# Altium PCB Mega8515_flasher_v2.PcbDoc
Units mm, origin at the board's own origin, x right, y up, seen from the top; angles counter-clockwise.
Board outline 47.27 x 49.53 mm, 2 copper layers (Top, Bottom), stack 1.67 mm thick; 19 components, 45 nets, 153 pads, 83 vias.
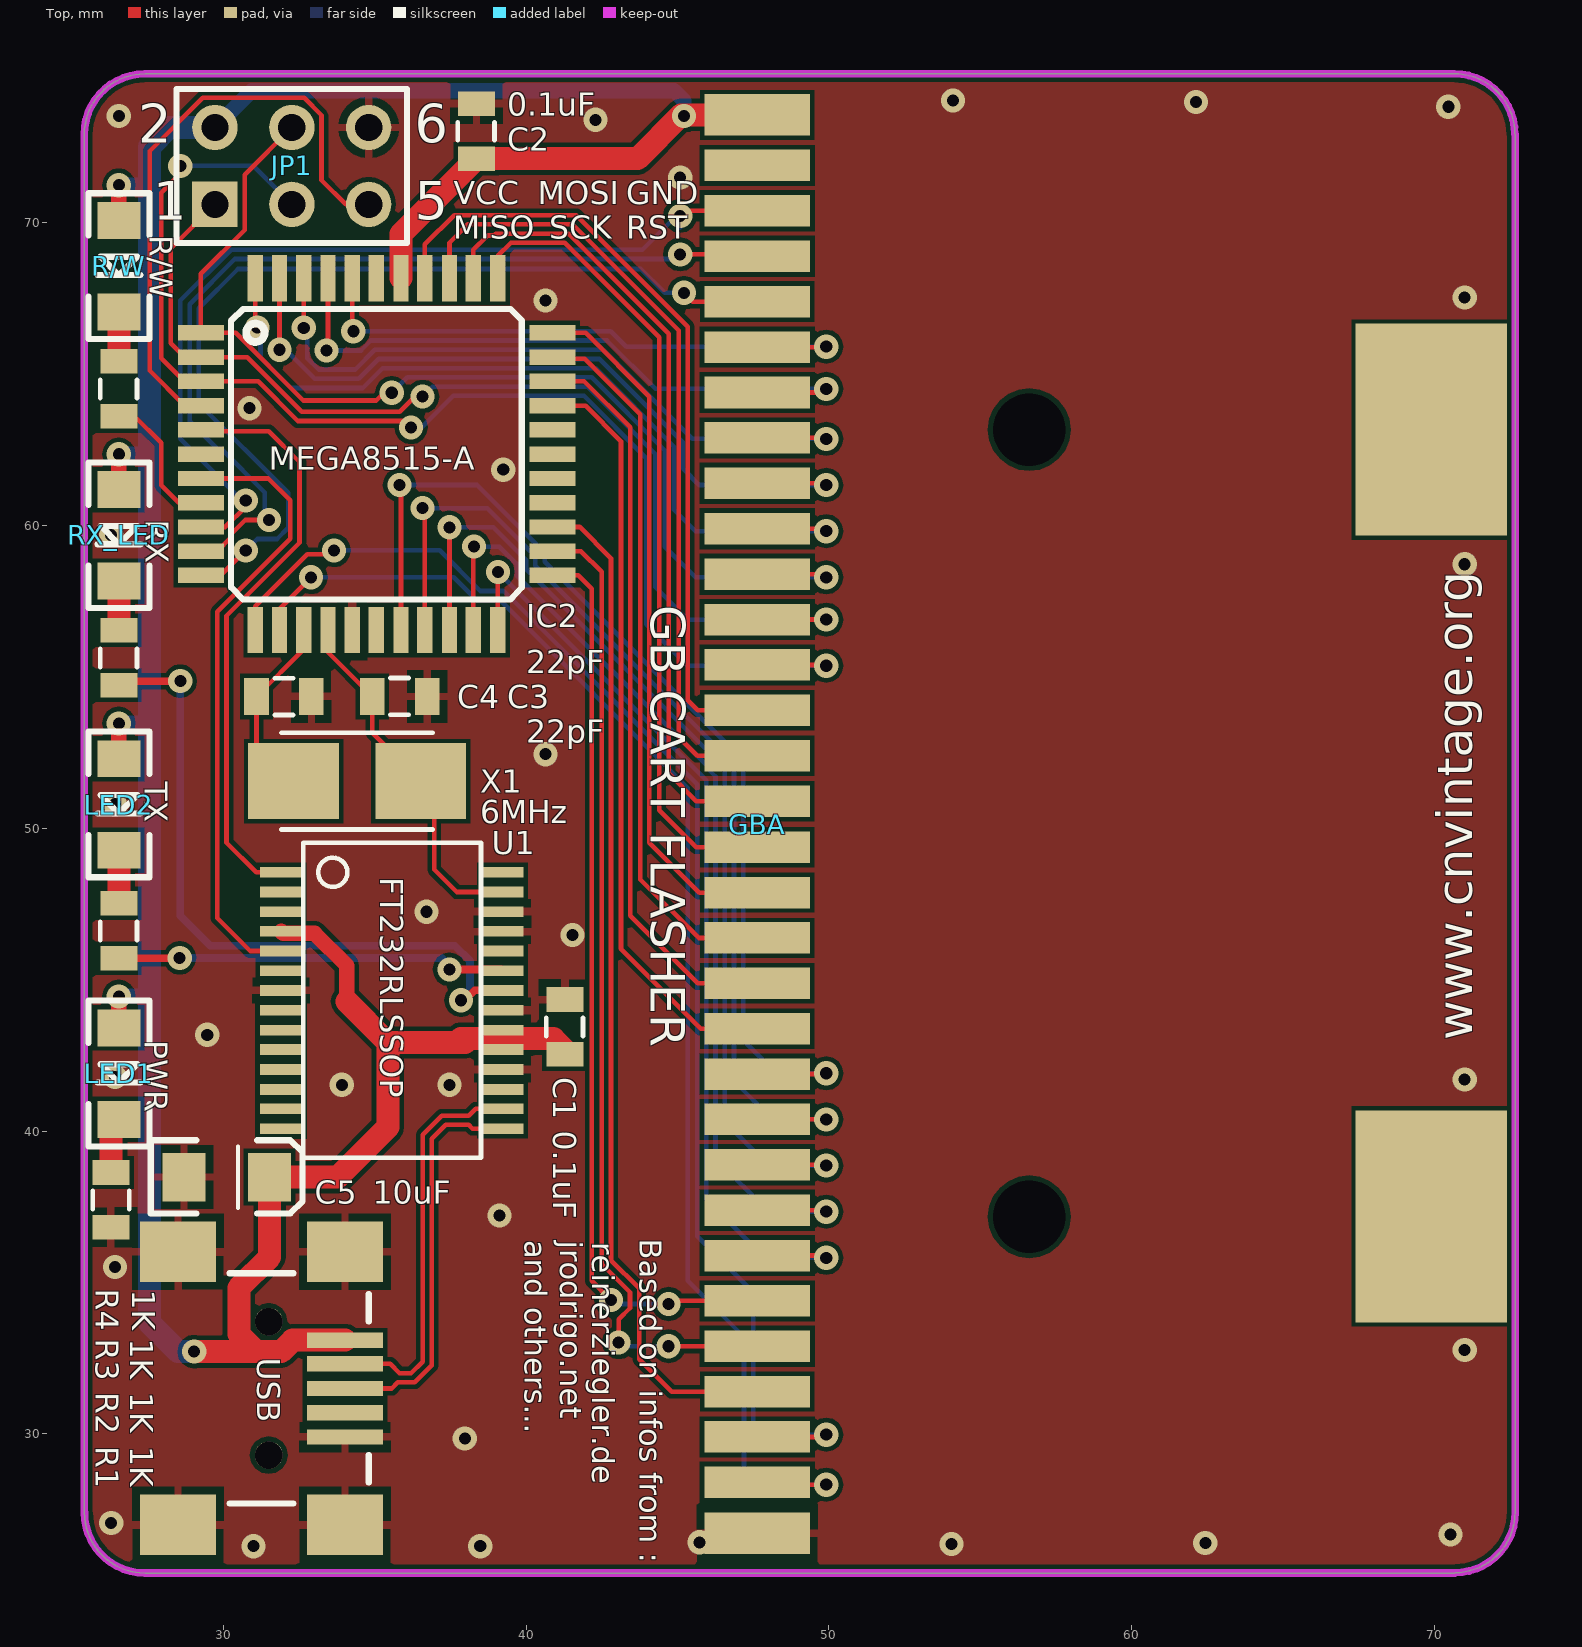
[diagram p0: Top view]
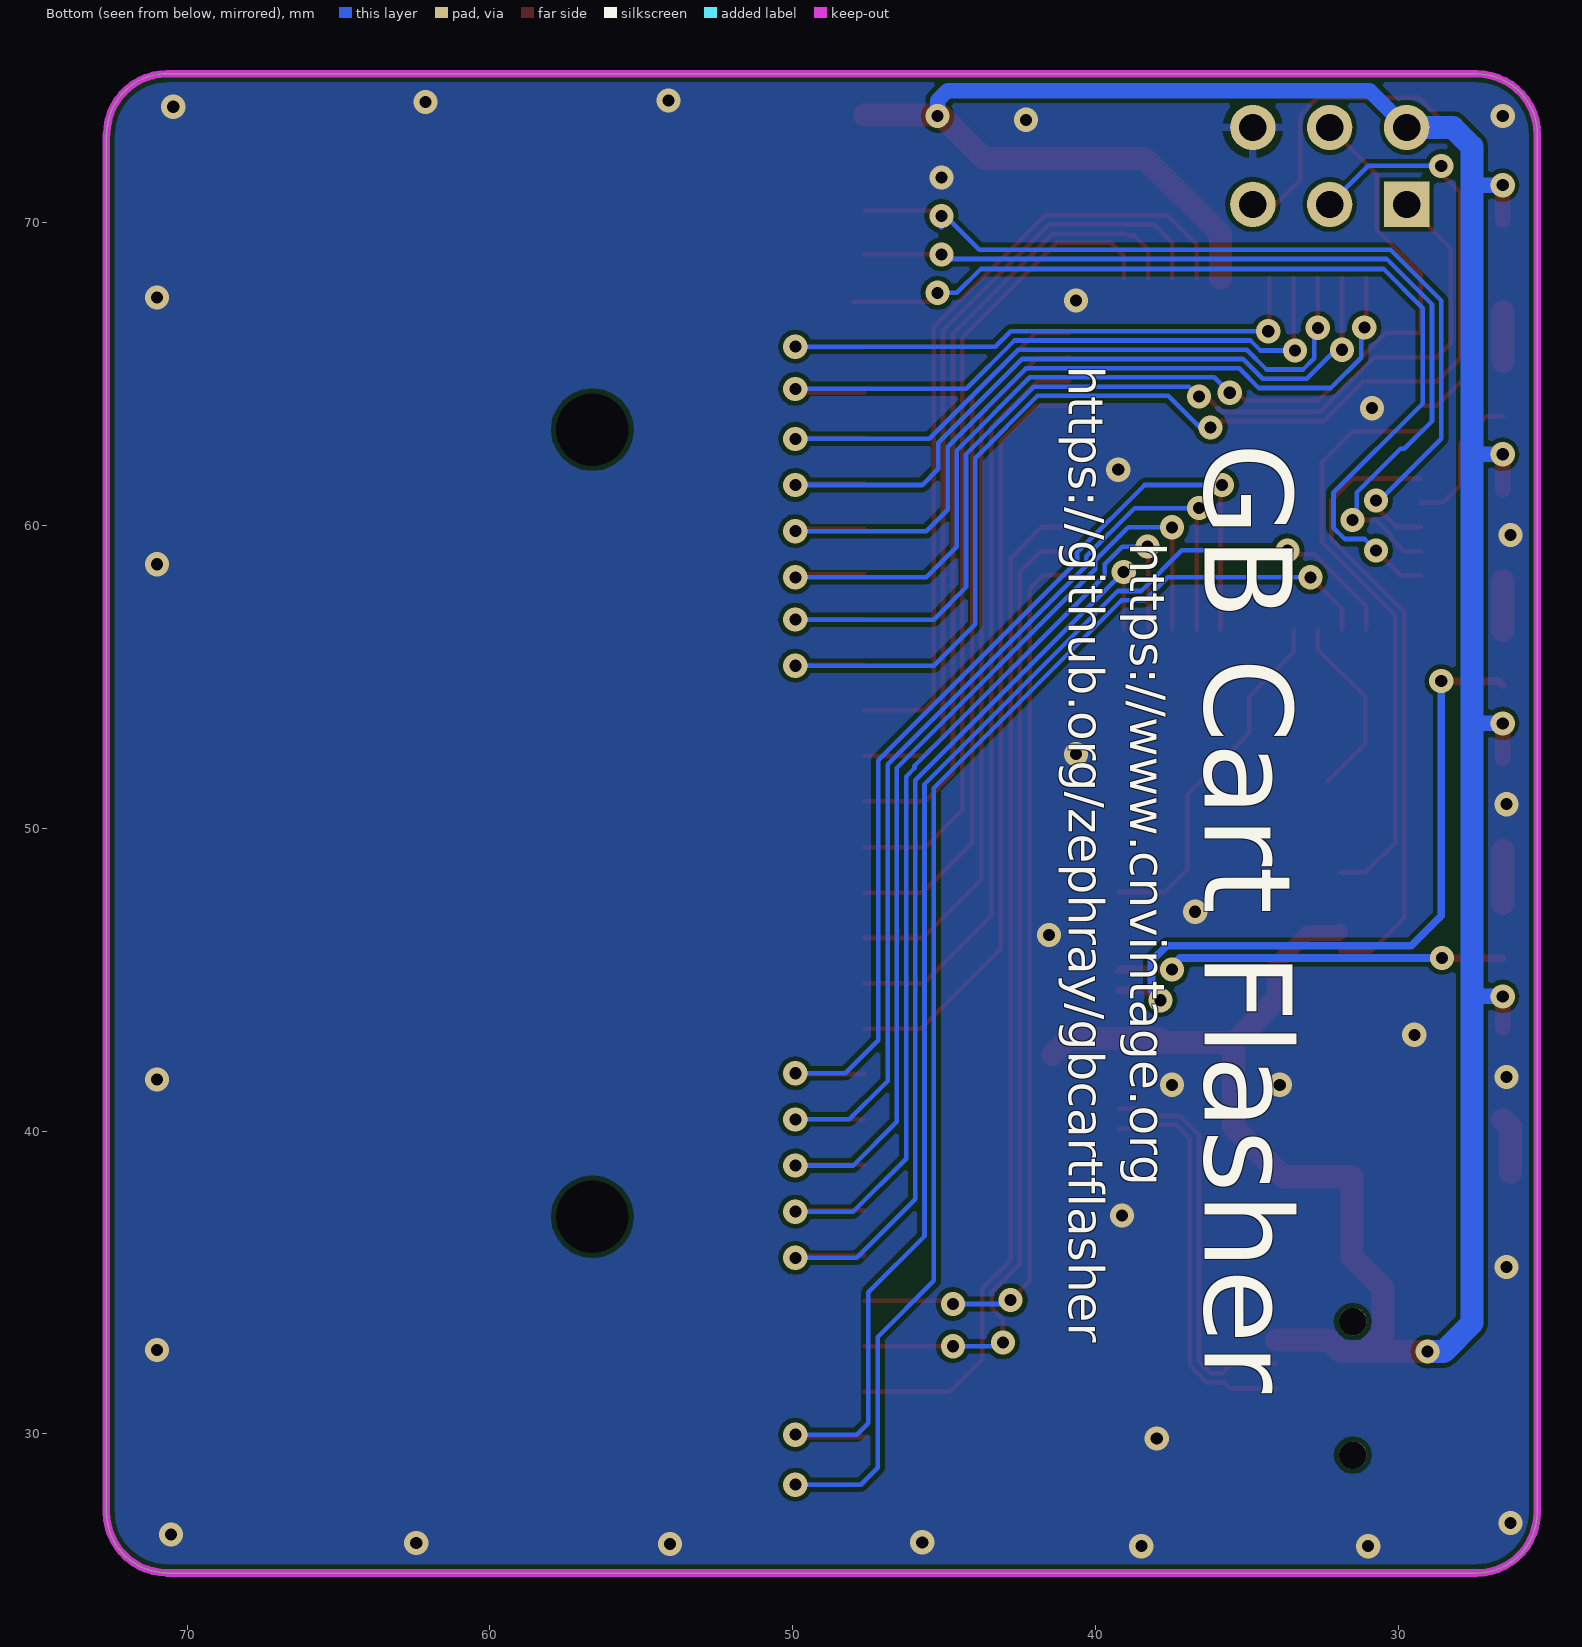
[diagram p1: Bottom view, seen from below]

## Layer stack, top to bottom
Top Solder: solder mask 0.0102, Solder Resist, Dk 3.5
Top: signal copper 0.035
Dielectric 1: core 1.6, FR-4, Dk 4.8
Bottom: signal copper 0.035
Bottom Solder: solder mask 0.0102, Solder Resist, Dk 3.5

## Board outline
25.407,27.4 ccw(c27.407,27.4) 27.407,25.4 70.669,25.4 70.669,25.412 ccw(c70.669,27.412) 72.669,27.412 72.669,72.93 72.658,72.93 ccw(c70.658,72.93) 70.658,74.93 70.657,74.93 27.407,74.93 27.4,74.923 ccw(c27.4,72.923) 25.4,72.923

## Design rules (kind name [scope] priority, off if disabled: settings)
Clearance mdViaVia [IsVia vs IsVia] p1: gap=0.203
Clearance mdPadVia [IsPad vs IsVia] p2: gap=0.152
Clearance mdPadPad [IsPad vs IsPad] p3: gap=0.152
Clearance mdWireVia [(InLayerClass('Signal Layers') AND IsTrack) vs IsVia] p4: gap=0.152
Clearance mdWirePad [(InLayerClass('Signal Layers') AND IsTrack) vs IsPad] p5: gap=0.152
Clearance mdWireWire [(InLayerClass('Signal Layers') AND IsTrack) vs (InLayerClass('Signal Layers') AND IsTrack)] p6: gap=0.152
Clearance [All] p7: gap=0.152
ComponentClearance [All] p1: gap=0 collisioncheckmode=3 verticalgap=0 showdistances=FALSE
HoleSize [All] p1: absolutevalues=TRUE maxlimit=2540 minlimit=0.305 maxpercent=80.000 minpercent=20.000
HoleToHoleClearance [All] p1: gap=0.203 allowstackedmicrovias=TRUE
PolygonConnect ThermalVias [IsVia] p1: connectstyle=Direct reliefconductorwidth=0.254 reliefentries=4 polygonreliefangle="90 Angle" airgapwidth=0.254
PolygonConnect [All] p2: connectstyle=Relief reliefconductorwidth=0.254 reliefentries=4 polygonreliefangle="90 Angle" airgapwidth=0.254
RoutingVias [All] p1: holewidth=0.4 width=0.8 viastyle="Through Hole" minholewidth=0.4 minwidth=0.8 maxholewidth=0.4 maxwidth=0.8
SilkToSilkClearance [All] p1 off: silktosilkclearance=0.254
SilkToSolderMaskClearance [IsPad] p1 off: minsilkscreentomaskgap=0.254 clearancetoexposedcopper=TRUE
SolderMaskExpansion [All] p1: expansion=0
Width [All] p1: maxlimit=2540 minlimit=0.152 preferedwidth=0.254
25 further rules are at their usual default settings.

## Components (designator, comment, footprint, x,y, rotation, side; value= is the part's Value field where it differs from the comment)
C1 "0.1uF" 0805 41.275,43.434 r90 top
C2 "0.1uF" 0805 38.354,73.025 r90 top
C3 "22pF" 0805 35.814,54.356 r0 top
C4 "22pF" 0805 32.004,54.356 r180 top
C5 "10uF" EIA3216 30.099,38.481 r0 top
GBA "GB_CART1" GB_CART_1 47.752,50.673 r270 top
IC2 "MEGA8515-A" TQFP44 35.052,62.357 r0 top
JP1 "SPARKFUN-CONNECTORS_M03X2SMT" HDR2X3 29.718,70.612 r0 top
LED1 "PWR_LED" LED-1206 26.543,41.91 r270 top
LED2 "TX_LED" LED-1206 26.543,50.8 r270 top
R1 "1K" 0805 26.289,37.719 r90 top
R2 "1K" 0805 26.543,46.609 r90 top
R3 "1K" 0805 26.543,55.626 r90 top
R4 "1K" 0805 26.543,64.516 r90 top
R/W "LED4" LED-1206 26.543,68.58 r270 top
RX_LED "LED3" LED-1206 26.543,59.69 r270 top
U1 "FT232RLSSOP" SSOP28DB 35.56,44.323 r270 top
USB "USB-MINIB-5PIN" USB-MINIB 31.496,31.496 r0 top
X1 "6MHz" 5032 34.417,51.562 r180 top

## Footprints (in the part's own frame and the unit in brackets; to place one, negate y for a bottom-side part, rotate by r counter-clockwise, add the part's x,y. Pads: shape width x height; smd on the part's side, far side on the other; paste and mask are expansions set on the pad)
0805 [mil] "0805"
  rect 32x48 smd: 1(-35.43,0) 2(36,0)
  silkscreen extent -12,-24 12,24
5032 [mm]
  rect 3x2.5 smd: 1(-2.1,0) 2(2.1,0)
  silkscreen extent -2.5,-1.6 2.5,1.6
EIA3216 [mil] "EIA3216"
  rect 56x63 smd: A(56,0) C(-55.12,0)
  silkscreen extent -98,-47 99,48
GB_CART_1 [mil] "GB_CART_1"
  rect 54x137 smd: 1(-901.38,-4.72) 32(943,-4.72)
  rect 41x137 smd: 2(-835.63,-4.72) 3(-776.57,-4.72) 4(-717.52,-4.72) 5(-658.46,-4.72) 6(-599.41,-4.72) 7(-540.35,-4.72) 8(-481.3,-4.72) 9(-422.24,-4.72) 10(-363.19,-4.72) 11(-304.13,-4.72) 12(-245.08,-4.72) 13(-186.02,-4.72) 14(-126.97,-4.72) 15(-67.91,-4.72) 16(-8.86,-4.72) 17(51,-4.72) 18(110,-4.72) 19(169,-4.72) 20(228,-4.72) 21(287,-4.72) 22(346,-4.72) 23(405,-4.72) 24(464,-4.72) 25(523,-4.72) 26(582,-4.72) 27(641,-4.72) 28(700,-4.72) 29(759,-4.72) 30(818,-4.72) 31(877,-4.72)
HDR2X3 [mm] "Connector; Header; 3x2 Position"
  rect 1.5x1.5 hole 0.9: 1(0,0)
  round 1.5 hole 0.9: 2(0,2.54) 3(2.54,0) 4(2.54,2.54) 5(5.08,0) 6(5.08,2.54)
  silkscreen extent -1.27,-1.27 6.35,3.81
LED-1206 [mil] "LED-1206"
  rect 48x56 smd: A(-59.06,0) C(60,0)
  silkscreen extent -94,-39 95,40
SSOP28DB [mil] "SSOP28DB"
  rect 14x55 smd: 1(-166.34,-143.94) 2(-140.75,-143.94) 3(-115.16,-143.94) 4(-89.57,-143.94) 5(-63.98,-143.94) 6(-38.39,-143.94) 7(-12.8,-143.94) 8(13,-143.94) 9(39,-143.94) 10(64,-143.94) 11(90,-143.94) 12(116,-143.94) 13(141,-143.94) 14(167,-143.94) 15(167,144) 16(141,144) 17(116,144) 18(90,144) 19(64,144) 20(39,144) 21(13,144) 22(-12.8,144) 23(-38.39,144) 24(-63.98,144) 25(-89.57,144) 26(-115.16,144) 27(-140.75,144) 28(-166.34,144)
  silkscreen extent -205,-115 205,116
TQFP44 [mil] "TQFP44"
  rect 60x20 smd: 1(-228.35,158) 2(-228.35,126) 3(-228.35,95) 4(-228.35,63) 5(-228.35,32) 6(-228.35,0) 7(-228.35,-31.5) 8(-228.35,-62.99) 9(-228.35,-94.49) 10(-228.35,-125.98) 11(-228.35,-157.48) 23(229,-157.48) 24(229,-125.98) 25(229,-94.49) 26(229,-62.99) 27(229,-31.5) 28(229,0) 29(229,32) 30(229,63) 31(229,95) 32(229,126) 33(229,158)
  rect 20x60 smd: 12(-157.48,-228.35) 13(-125.98,-228.35) 14(-94.49,-228.35) 15(-62.99,-228.35) 16(-31.5,-228.35) 17(0,-228.35) 18(32,-228.35) 19(63,-228.35) 20(95,-228.35) 21(126,-228.35) 22(158,-228.35) 34(158,229) 35(126,229) 36(95,229) 37(63,229) 38(32,229) 39(0,229) 40(-31.5,229) 41(-62.99,229) 42(-94.49,229) 43(-125.98,229) 44(-157.48,229)
  silkscreen extent -189,-189 189,189
USB-MINIB [mil] "USB-MINIB"
  round 36 hole 36: 1(0,-86.61) 1(0,87)
  rect 99x20 smd: D+(99,0) D-(99,32) GND(99,-62.99) ID(99,-31.5) VBUS(99,63)
  rect 99x79 smd: MTN1(-118.11,178) MTN2(99,178) MTN3(-118.11,-177.17) MTN4(99,-177.17)
  silkscreen extent -51,-150 130,150

## Part data
C1 C2: library part CAP1206, "<b>Capacitor</b> / Standard 0603 ceramic capacitor, and 0.1\" leaded capacitor."
C3 C4: library part CAP0805, "<b>Capacitor</b> / Standard 0603 ceramic capacitor, and 0.1\" leaded capacitor."
C5: library part 10UF-TANT, "10uF Tantalum SMT<br> / CAP-00811- 16V 10% (EIA-3216)"
IC2: "<b>MICROCONTROLLER</b><p> / 8 Kbytes FLASH<br> / 512 bytes SRAM<br> / 512 bytes EEPROM<br> / USART<br> / 8-channel 10 bit ADC<p> / Source: avr.lbr"
JP1: "2x3 .1\" header.<br> / Shrouded, with keying- CONN-10681<br> / SMT- CONN-11415<br> / Pogo pins- HW-11044"
LED1 LED2 R/W RX_LED: library part LED1206, "<b>LEDs</b> / Standard schematic elements and footprints for 5mm, 3mm, 1206, and 0603 sized LEDs. 5mm - Spark Fun Electronics SKU : COM-00529 (and others)"
R1 R2 R3 R4: library part RESISTOR1206, "<b>Resistor</b> / Basic schematic elements and footprints for 0603, 1206, and PTH resistors."
U1: "<b>USB UART</b> / FT232RL 4<sup>th</sup> Generation USB UART (USB &lt;-&gt; Serial) Controller. <br> / Spark Fun Electronics SKU : COM-00650<br> / Production SKU IC-00870"
USB: "<b>Mini-USB \"B\" connector with 5th pin broken out.</b><p> / Created new symbol breaking out 5th \"ID\" pin in mini/micro USB connector spec.  See: http://en.wikipedia.org/wiki/Mini_usb#Cables.  Uses same footprint as 4-pin symbol.<p> /   / Also added pins to connect to mounting / shield pads if required (probably not generally needed as signals aren't shielded once they leave the connector)."
X1: library part SPARKFUN-FREQCTRL_CRYSTAL, "Various standard crystals. Proven footprints. Spark Fun Electronics SKU : COM-00534"

## Free pads (board coordinates)
  round 0 hole 2.4: 1(56.617,63.17) 2(56.617,37.17)
  rect 5x7 / inner rect 0x0 / far side rect 0x0 all layers, no hole: 3(69.901,63.17) 4(69.901,37.186)

## Via types
v1: diameter 0.8, hole 0.4, Top to Bottom, tented both sides, 82 vias
v2: diameter 0.8, hole 0.4, Top to Bottom, 1 vias

## Nets (pads, with @x,y where several pads share a name; then routed paths per layer and width w, separated by ;. In a path a pad name is that pad's centre, name@x,y a point inside that pad or via, vN(x,y) a via of type N, cw(c..) or ccw(c..) an arc to the next point about the centre after c; other vN are vias at no path point)
/CS: GBA.5 IC2.11 | length 31.8
  Top w0.152: IC2.11 29.909,58.357 v1(30.734,59.182) ; v1(45.212,67.691) 45.505,67.398 GBA.5@48.006,67.398
  Bottom w0.152: v1(30.734,59.182) 31.111,59.559 31.767,59.559 32.135,59.927 32.135,61.083 29.185,64.033 29.185,67.184 30.479,68.478 43.79,68.478 44.577,67.691 v1(45.212,67.691)
/RD: GBA.4 IC2.10 | length 30.5
  Top w0.152: IC2.10 29.791,59.157 30.243,59.608 30.243,59.707 30.723,60.187 v1(31.507,60.187) ; v1(45.085,68.961) GBA.4@47.632,68.961
  Bottom w0.152: v1(31.507,60.187) 31.363,60.331 31.363,61.093 29.922,62.534 29.795,62.534 28.88,63.449 28.88,67.311 30.378,68.809 44.933,68.809 v1(45.085,68.961)
/RST: GBA.30 IC2.12 | length 46.1
  Top w0.152: IC2.12 31.052,57.341 32.766,59.055 33.528,59.055 v1(33.655,59.182) ; GBA.30 49.835,29.896 v1(49.911,29.972)
  Bottom w0.152: v1(33.655,59.182) 37.148,59.182 38.487,57.842 39.263,57.842 45.644,51.461 45.644,36.525 47.498,34.671 47.498,30.353 47.879,29.972 v1(49.911,29.972)
/WR: GBA.3 IC2.9 | length 30.3
  Top w0.152: IC2.9 30.062,59.957 30.734,60.629 v1(30.734,60.833) ; v1(45.085,70.231) 45.252,70.398 GBA.3
  Bottom w0.152: v1(30.734,60.833) 30.607,60.833 28.575,62.865 28.575,67.437 30.251,69.113 43.84,69.113 44.831,70.104 45.085,69.85 v1(45.085,70.231)
A0: GBA.6 IC2.40 | length 19.9
  Top w0.152: IC2.40 34.252,66.459 v1(34.29,66.421) ; GBA.6 49.896,65.898 v1(49.911,65.913)
  Bottom w0.152: v1(34.29,66.421) 42.796,66.421 43.304,65.913 v1(49.911,65.913)
A1: GBA.7 IC2.41 | length 22
  Top w0.152: v1(33.401,65.786) 33.452,65.837 IC2.41 ; GBA.7 49.793,64.398 v1(49.911,64.516)
  Bottom w0.152: v1(33.401,65.786) 34.544,65.786 34.874,66.116 42.67,66.116 44.27,64.516 v1(49.911,64.516)
A2: GBA.8 IC2.42 | length 23.8
  Top w0.152: v1(32.652,66.535) IC2.42 ; GBA.8 49.878,62.898 v1(49.911,62.865)
  Bottom w0.152: v1(32.652,66.535) 32.772,66.415 32.772,65.526 33.141,65.157 34.346,65.157 35,65.811 42.544,65.811 45.49,62.865 v1(49.911,62.865)
A3: GBA.9 IC2.43 | length 25.6
  Top w0.152: v1(31.852,65.811) IC2.43 ; GBA.9 49.854,61.398 v1(49.911,61.341)
  Bottom w0.152: v1(31.852,65.811) 32.056,65.811 33.014,64.853 34.473,64.853 35.127,65.507 42.417,65.507 45.187,62.737 45.187,61.874 45.72,61.341 v1(49.911,61.341)
A4: GBA.10 IC2.44 | length 27.8
  Top w0.152: IC2.44 31.052,66.611 v1(31.115,66.548) ; GBA.10 49.83,59.898 v1(49.911,59.817)
  Bottom w0.152: v1(31.115,66.548) 31.223,66.44 31.223,65.551 32.226,64.548 34.599,64.548 35.253,65.202 42.291,65.202 44.882,62.611 44.882,60.528 45.593,59.817 v1(49.911,59.817)
A5: GBA.11 IC2.1 JP1.4 | length 36.8
  Top w0.152: JP1.4 30.697,71.591 30.697,69.767 29.252,68.323 IC2.1 30.404,66.37 32.639,64.135 35.052,64.135 35.306,64.389 v1(35.56,64.389) ; GBA.11 49.806,58.398 v1(49.911,58.293)
  Bottom w0.152: v1(35.56,64.389) 36.068,64.897 42.163,64.897 44.577,62.483 44.577,59.309 45.593,58.293 v1(49.911,58.293)
A6: GBA.12 IC2.2 JP1.1 | length 36.2
  Top w0.152: JP1.1 28.261,69.155 28.261,66.022 28.726,65.557 IC2.2 30.786,65.557 32.583,63.76 35.82,63.76 36.322,64.262 v1(36.576,64.262) ; GBA.12 49.909,56.898 v1(49.911,56.896)
  Bottom w0.152: v1(36.576,64.262) 36.906,64.592 42.036,64.592 44.272,62.356 44.272,57.963 45.339,56.896 v1(49.911,56.896)
A7: GBA.13 IC2.3 JP1.3 | length 43.4
  Top w0.152: v1(28.575,71.882) 28.575,71.628 27.94,70.993 27.94,65.53 28.7,64.77 IC2.3 31.142,64.77 32.456,63.456 35.985,63.456 v1(36.195,63.246) ; GBA.13 49.885,55.398 v1(49.911,55.372)
  Bottom w0.152: v1(28.575,71.882) 30.988,71.882 JP1.3 ; v1(36.195,63.246) 36.551,63.246 37.592,64.287 41.91,64.287 43.967,62.23 43.967,56.744 45.339,55.372 v1(49.911,55.372)
A8: GBA.14 IC2.37 | length 26.5
  Top w0.152: IC2.37 36.652,69.291 37.617,70.256 41.654,70.256 45.339,66.571 45.339,54.229 45.67,53.898 GBA.14
A9: GBA.15 IC2.36 | length 26.7
  Top w0.152: IC2.36 37.465,69.342 38.075,69.952 41.528,69.952 45.034,66.445 45.034,53.01 45.646,52.398 GBA.15
A10: GBA.16 IC2.35 | length 26.8
  Top w0.152: IC2.35 38.252,69.113 38.724,69.585 38.931,69.585 38.993,69.647 41.401,69.647 44.704,66.344 44.704,51.816 45.622,50.898 GBA.16
A11: GBA.17 IC2.34 | length 26.9
  Top w0.152: IC2.34 39.065,68.91 39.497,69.342 41.275,69.342 44.399,66.218 44.399,50.597 45.618,49.378 GBA.17
A12: GBA.18 IC2.33 | length 23.1
  Top w0.152: IC2.33 41.961,66.37 44.069,64.262 44.069,49.53 45.72,47.879 GBA.18
A13: GBA.19 IC2.32 | length 23.7
  Top w0.152: IC2.32 40.919,65.507 41.935,65.507 43.764,63.678 43.764,48.311 45.695,46.38 GBA.19
A14: GBA.20 IC2.31 | length 24.4
  Top w0.152: IC2.31 41.91,64.77 43.434,63.246 43.434,47.117 45.669,44.882 GBA.20
A15: GBA.21 IC2.30 | length 25.1
  Top w0.152: IC2.30 41.961,63.957 43.129,62.789 43.129,46.025 45.771,43.383 GBA.21
D0: GBA.22 IC2.18 | length 34.8
  Top w0.152: v1(35.814,61.341) 35.865,61.29 IC2.18 ; GBA.22 49.886,41.885 v1(49.911,41.91)
  Bottom w0.152: v1(35.814,61.341) 38.377,61.341 40.608,59.11 40.608,58.806 47.168,52.246 47.168,43.002 48.26,41.91 v1(49.911,41.91)
D1: GBA.23 IC2.19 | length 34.3
  Top w0.152: v1(36.576,60.579) 36.652,60.503 IC2.19 ; GBA.23 v1(49.911,40.386)
  Bottom w0.152: v1(36.576,60.579) 38.708,60.579 40.303,58.984 40.303,58.68 46.863,52.12 46.863,41.656 48.133,40.386 v1(49.911,40.386)
D2: GBA.24 IC2.20 | length 33.9
  Top w0.152: IC2.20 v1(37.465,59.944) ; GBA.24 49.886,38.887 v1(49.911,38.862)
  Bottom w0.152: v1(37.465,59.944) 38.912,59.944 39.999,58.857 39.999,58.553 46.558,51.994 46.558,40.31 48.006,38.862 v1(49.911,38.862)
D3: GBA.25 IC2.21 | length 33.5
  Top w0.152: IC2.21 38.252,59.334 v1(38.278,59.309) ; GBA.25 49.86,37.389 v1(49.911,37.338)
  Bottom w0.152: v1(38.278,59.309) 39.116,59.309 39.694,58.731 39.694,58.35 45.974,52.07 45.974,51.993 46.253,51.714 46.253,39.091 48.006,37.338 v1(49.911,37.338)
D4: GBA.26 IC2.22 | length 32.6
  Top w0.152: IC2.22 v1(39.065,58.471) ; GBA.26 49.835,35.89 v1(49.911,35.814)
  Bottom w0.152: v1(39.065,58.471) 45.949,51.587 45.949,37.744 47.879,35.814 v1(49.911,35.814)
D5: GBA.27 IC2.23 | length 30.2
  Top w0.152: IC2.23 41.719,58.357 42.164,57.912 42.164,35.052 v1(42.799,34.417) ; v1(44.704,34.29) 44.806,34.392 GBA.27
  Bottom w0.152: v1(42.799,34.417) 42.926,34.29 v1(44.704,34.29)
D6: GBA.28 IC2.24 | length 32.5
  Top w0.152: IC2.24 41.808,59.157 42.494,58.471 42.494,35.611 43.428,34.677 43.428,34.157 43.053,33.782 v1(43.053,33.02) ; v1(44.704,32.893) GBA.28
  Bottom w0.152: v1(43.053,33.02) 43.18,32.893 v1(44.704,32.893)
D7: GBA.29 IC2.25 | length 33.5
  Top w0.152: IC2.25 41.77,59.957 42.799,58.928 42.799,35.737 43.732,34.804 43.732,32.468 44.806,31.394 GBA.29
FTDI_RX: IC2.7 U1.5 | length 20.6
  Top w0.152: IC2.7 31.483,61.557 32.207,60.833 32.207,59.562 29.794,57.149 29.794,47.041 30.887,45.948 U1.5
FTDI_TX: IC2.5 U1.1 | length 19.5
  Top w0.152: IC2.5 29.252,63.119 31.496,63.119 32.512,62.103 32.512,59.436 30.099,57.023 30.099,49.53 31.081,48.548 U1.1
GND: C1.2 C2.2 C3.2 C4.1 C5.C GBA.32 IC2.16 JP1.6 R1.1 U1.7 U1.18 U1.21 U1.25 U1.26 USB.GND USB.MTN1 USB.MTN2 USB.MTN3 USB.MTN4
  other v1: 30.988,26.289 38.481,26.289 54.051,26.365 62.433,26.391 45.72,26.416 26.289,27.051 37.973,29.845 71,32.766 26.416,35.509 39.116,37.211 33.909,41.529 37.465,41.529 71,41.707 26.416,41.783 29.464,43.18 41.529,46.482 36.703,47.244 26.416,50.8 40.64,52.451 71,58.725 26.289,59.69 39.243,61.849 30.861,63.881 40.64,67.437 71,67.539 45.085,71.501 42.291,73.406 26.543,73.533 70.46,73.838 62.128,73.99 54.102,74.041
  other v2: 70.536,26.67
ICSP_RESET: IC2.4 JP1.5 | length 20.1
  Top w0.152: IC2.4 28.726,63.957 27.559,65.124 27.559,72.377 29.313,74.131 32.663,74.131 33.237,73.557 33.237,71.411 34.036,70.612 JP1.5
NetC4_2: C4.2 IC2.14 X1.2 | length 6.2
  Top w0.152: X1.2 31.09,52.789 C4.2 32.652,55.918 IC2.14
NetLED1_C: LED1.C R1.2 | length 1.9
  Top w0.762: R1.2 26.289,40.132 LED1.C
NetLED2_C: LED2.C R2.2 | length 1.8
  Top w0.762: R2.2 LED2.C
NetR3_2: R3.2 RX_LED.C | length 1.6
  Top w0.762: R3.2 RX_LED.C
NetR4_2: R4.2 R/W.C | length 1.6
  Top w0.762: R4.2 R/W.C
NetU1_15: U1.15 USB.D+ | length 13.3
  Top w0.152: USB.D+ 35.56,31.496 35.763,31.699 36.321,31.699 36.881,32.259 36.881,39.752 37.337,40.208 38.1,40.208 38.227,40.081 U1.15
NetU1_16: U1.16 USB.D- | length 13.3
  Top w0.152: USB.D- 35.509,32.309 35.814,32.004 36.195,32.004 36.576,32.385 36.576,39.878 37.211,40.513 38.1,40.513 38.329,40.742 U1.16
RWLED: IC2.8 R4.1 | length 4.7
  Top w0.152: R4.1 27.062,63.616 27.94,62.738 27.94,61.341 28.524,60.757 IC2.8
RXLED: R3.1 U1.22 | length 23.2
  Top w0.254: R3.1 26.681,54.864 v1(28.575,54.864) ; v1(37.846,44.323) 37.719,44.45 38.1,44.45 38.298,44.648 U1.22
  Bottom w0.254: v1(28.575,54.864) 28.575,47.117 29.566,46.126 37.638,46.126 38.144,45.62 38.144,44.66 37.846,44.361 v1(37.846,44.323)
SND: GBA.31 IC2.13 | length 46
  Top w0.152: IC2.13 31.852,57.252 v1(32.893,58.293) ; GBA.31 47.708,28.321 v1(49.911,28.321)
  Bottom w0.152: v1(32.893,58.293) 37.606,58.293 38.361,57.537 39.137,57.537 45.339,51.335 45.339,35.052 47.193,33.198 47.193,28.88 47.752,28.321 v1(49.911,28.321)
TXLED: R2.1 U1.23 | length 13
  Top w0.254: R2.1 28.564,45.709 v1(28.553,45.72) ; v1(37.465,45.339) 39.177,45.339 U1.23
  Bottom w0.254: v1(28.553,45.72) 37.211,45.72 37.465,45.466 v1(37.465,45.339)
VCC: C1.1 C2.1 C5.A GBA.1 IC2.38 JP1.2 LED1.A LED2.A R/W.A RX_LED.A U1.4 U1.19 U1.20 USB.VBUS | length 114.5
  Top w0.508: LED1.A v1(26.543,44.45) ; LED2.A v1(26.543,53.467) ; RX_LED.A v1(26.543,62.357) ; R/W.A v1(26.543,71.247) ; U1.4 31.97,46.532 33.009,46.532 34.075,45.466 34.075,44.284
  Top w0.762: v1(29.032,32.715) 31.064,32.715 ; USB.VBUS 32.287,33.096 31.906,32.715 31.064,32.715 ; 34.075,44.284 35.433,42.926 ; IC2.38 35.865,69.636 C2.1 43.677,72.125 45.12,73.568 GBA.1 ; C1.1@41.413,42.534 40.894,43.053 37.846,43.053 37.973,42.926 35.433,42.926 ; 31.064,32.715 31.064,32.737 30.505,33.295 30.505,34.823 31.521,35.839 C5.A 33.782,38.481 35.433,40.132 35.433,42.926
  Bottom w0.508: v1(26.543,44.45) 27.559,44.45 ; v1(26.543,53.467) 27.559,53.467 ; v1(26.543,62.357) 27.432,62.357 27.559,62.484 ; v1(26.543,71.247) 27.559,71.247 ; JP1.2 30.937,74.371 44.882,74.371 45.212,74.041 v1(45.212,73.533)
  Bottom w0.762: v1(29.032,32.715) 28.499,32.715 27.559,33.655 27.559,44.45 27.559,53.467 27.559,62.484 27.559,71.247 27.559,72.517 28.194,73.152 JP1.2
XIN: C3.1 IC2.15 U1.27 X1.1 | length 11.9
  Top w0.152: IC2.15 33.452,55.818 C3.1 34.914,53.165 X1.1 36.957,51.122 36.957,48.641 37.7,47.898 U1.27
pads on no net: GBA.2 IC2.6 IC2.17 IC2.26 IC2.27 IC2.28 IC2.29 IC2.39 U1.2 U1.3 U1.6 U1.8 U1.9 U1.10 U1.11 U1.12 U1.13 U1.14 U1.17 U1.24 U1.28 USB.1 USB.ID

## Polygon pours and split planes (outlines as drawn)
GND on Top "Top-No Net" (solid, remove dead copper, pour order 14): 25.4,74.93 25.4,25.4 72.669,25.4 72.669,50.171 72.669,74.93
GND on Bottom "Top-No Net" (solid, remove dead copper, pour order 16): 25.4,74.93 25.4,25.4 72.746,25.4 72.746,74.93

## Keep-outs
Keep-Out Layer:
  lines w0.254: 25.4,27.4 25.4,72.923 cw(c27.4,72.923) 27.4,74.923 ; 25.407,27.4 ccw(c27.407,27.4) 27.407,25.4 70.669,25.4 ; 27.407,74.93 70.657,74.93 cw(c70.658,72.93) 72.658,72.93 ; 70.669,25.412 ccw(c70.669,27.412) 72.669,27.412 72.669,72.93

## Silkscreen, mask and mechanical layers (free items; w line width, h text height)
Top Overlay:
  text "VCC" at 37.613,70.614 h0.76
  text "MOSI" at 40.386,70.612 h0.76
  text "GND" at 43.307,70.612 h0.76
  text "R/W" at 27.559,69.596 h0.76 r270
  text "MISO" at 37.592,69.469 h0.76
  text "SCK" at 40.767,69.469 h0.76
  text "RST" at 43.307,69.469 h0.76
  text "RX" at 27.432,60.198 h0.76 r270
  text "GB CART FLASHER" at 43.739,57.379 h1.97 r270
  text "TX" at 27.407,51.538 h0.76 r270
  text "PWR" at 27.407,43.002 h0.76 r270
  text "www.cnvintage.org" at 71.653,43.002 h2 r90
  text "Based on infos from :" at 43.51,36.449 h1.26 r270
  text "and others..." at 39.7,36.398 h1.26 r270
  text "jrodrigo.net" at 40.869,36.373 h1.26 r270
  text "reinerziegler.de" at 41.935,36.322 h1.26 r270
Bottom Overlay:
  text "https://github.org/zephray/gbcartflasher" at 41.275,65.278 h2 r90
  text "GB Cart Flasher" at 37.338,62.738 h5 r90
  text "https://www.cnvintage.org" at 39.243,59.436 h2 r90

## Text inside footprints (layer, text, board x,y; h text height)
JP1: Top Overlay "1" at 27.686,70.104 h1.27; Top Overlay "2" at 27.178,72.644 h1.27; Top Overlay "5" at 36.322,70.104 h1.27; Top Overlay "6" at 36.322,72.644 h1.27